# Altium PCB main.PcbDoc
Units mm, origin at the board's own origin, x right, y up, seen from the top; angles counter-clockwise.
Board outline 156 x 26 mm, 2 copper layers (Top Layer, Bottom Layer); 35 components, 16 nets, 174 pads, 20 vias.
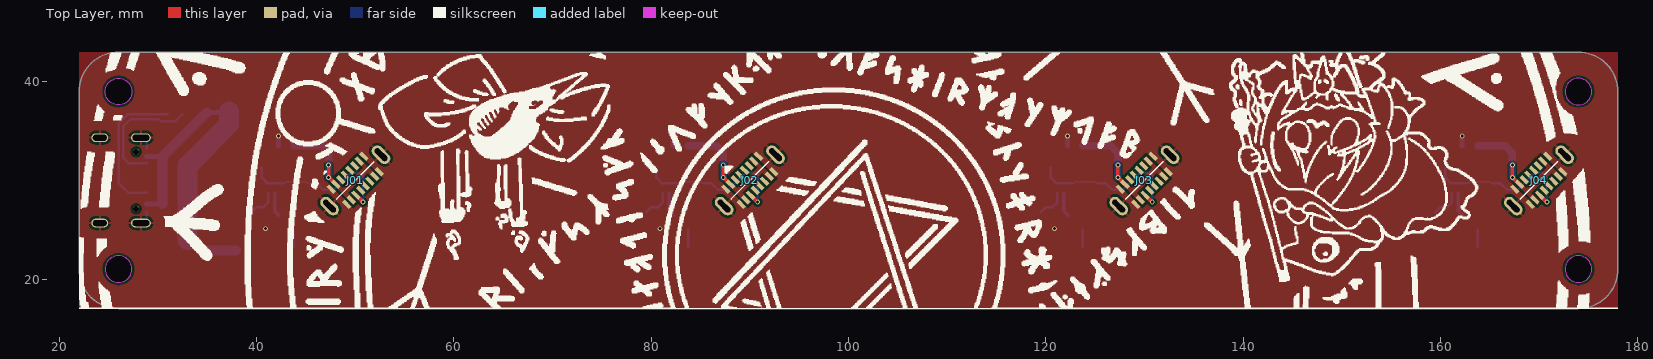
[diagram p0: Top Layer view]
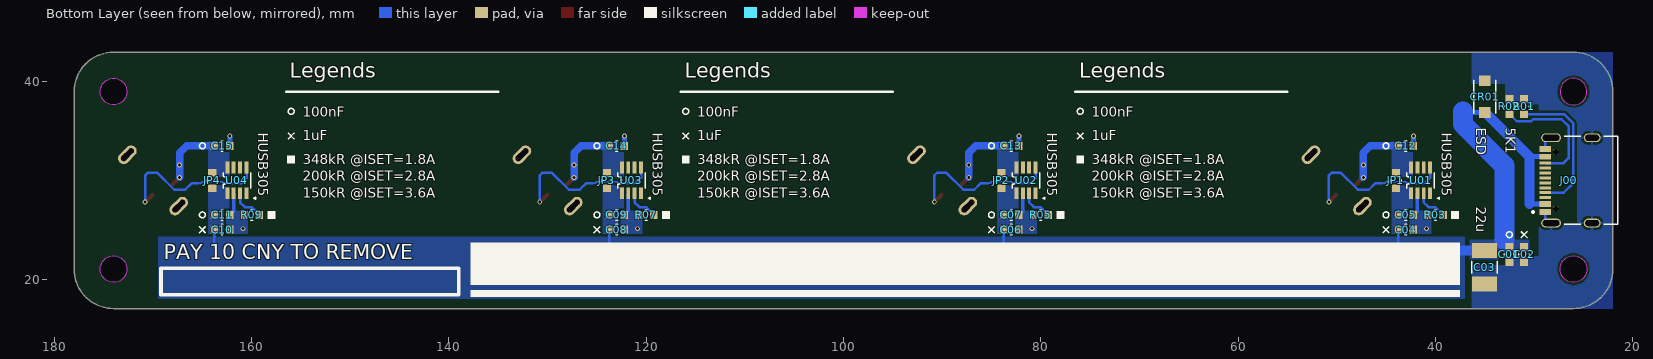
[diagram p1: Bottom Layer view, seen from below]
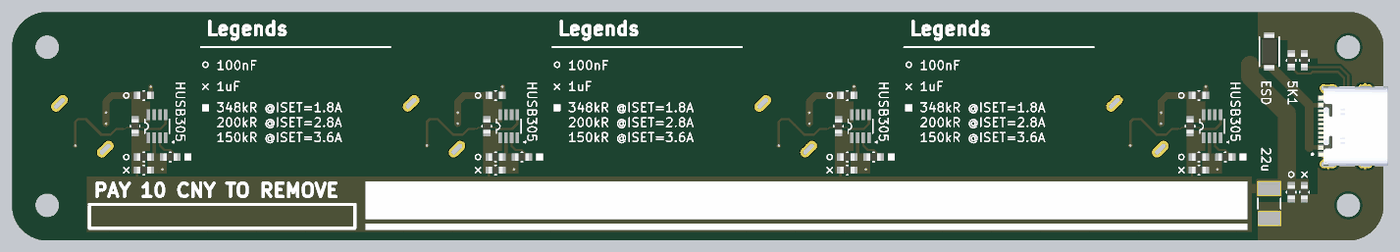
[diagram p2: 3D render of the assembled board from below, using the file's embedded part models]

## Layer stack, top to bottom
Top Solder: solder mask 0.0102, Solder Resist, Dk 3.5
Top Layer: signal copper 0.0356
Dielectric 1: dielectric 0.32, FR-4, Dk 4.8
Bottom Layer: signal copper 0.0356
Bottom Solder: solder mask 0.0102, Solder Resist, Dk 3.5

## Board outline
22,21 22,39 cw(c26,39) 26,43 174,43 cw(c174,39) 178,39 178,21 cw(c174,21) 174,17 26,17 cw(c26,21)
cut-out: 172.65,21 ccw(c174,21) 174,19.65 ccw(c174,21) 175.35,21 ccw(c174,21) 174,22.35 ccw(c174,21)
cut-out: 172.65,39 ccw(c174,39) 174,37.65 ccw(c174,39) 175.35,39 ccw(c174,39) 174,40.35 ccw(c174,39)
cut-out: 24.65,21 ccw(c26,21) 26,19.65 ccw(c26,21) 27.35,21 ccw(c26,21) 26,22.35 ccw(c26,21)
cut-out: 26,37.65 cw(c26,39) 24.65,39 cw(c26,39) 26,40.35 cw(c26,39) 27.35,39 cw(c26,39)

## Design rules (kind name [scope] priority, off if disabled: settings)
Clearance [All] p1: gap=0.254 ignorepadtopadclearanceinfootprint=FALSE except(0.102: Arc-Arc Arc-Track Arc-SMDPad Track-Track Track-SMDPad; 0.152: SMDPad-SMDPad; 0.2: Arc-Hole Track-Hole; 0.203: Arc-Via Track-Via Via-Fill Via-Poly Via-Region; 0.35: Arc-THPad Track-THPad)
PolygonConnect [All] p1: thpad.connectstyle=Relief thpad.reliefconductorwidth=0.254 thpad.reliefentries=4 thpad.polygonreliefangle="90 Angle" thpad.airgapwidth=0.254 smdpad.connectstyle=Direct smdpad.reliefconductorwidth=0.254 smdpad.reliefentries=4 smdpad.polygonreliefangle="90 Angle" smdpad.airgapwidth=0.254 via.connectstyle=Direct via.reliefconductorwidth=0.254 via.reliefentries=4 via.polygonreliefangle="90 Angle" via.airgapwidth=0.254
RoutingVias [All] p1: holewidth=0.3 width=0.5 viastyle="Through Hole" minholewidth=0.3 minwidth=0.5 maxholewidth=0.3 maxwidth=0.5
SolderMaskExpansion [All] p1: expansion=0.102 istentingtop=FALSE
SupplyNets "Schematic Supply Nets_5" [InNet('VPORT3')] p1: voltage=0.000
SupplyNets "Schematic Supply Nets_4" [InNet('VPORT2')] p2: voltage=0.000
SupplyNets "Schematic Supply Nets_3" [InNet('GND')] p3: voltage=0.000
SupplyNets "Schematic Supply Nets_2" [InNet('VPORT4')] p4: voltage=0.000
SupplyNets "Schematic Supply Nets_1" [InNet('VPORT1')] p5: voltage=0.000
SupplyNets "Schematic Supply Nets" [InNet('VBUS')] p6: voltage=0.000
Width [All] p1: maxlimit=5.08 minlimit=0.102 preferedwidth=0.254 minimp=50.000000 maximp=50.000000 favimp=50.000000
30 further rules are at their usual default settings.

## Components (designator, comment, footprint, x,y, rotation, side; value= is the part's Value field where it differs from the comment)
C01 "100n" RC0603N_YAG 32.5,22.5 r270 bottom
C02 "1u" RC0603N_YAG 31,22.5 r270 bottom
C03 "22u" RC1210 35,21.2 r270 bottom
C04 "1u" RC0603N_YAG 43,25 r180 bottom
C05 "100n" RC0603N_YAG 43,26.5 r180 bottom
C06 "1u" RC0603N_YAG 83,25 r180 bottom
C07 "100n" RC0603N_YAG 83,26.5 r180 bottom
C08 "1u" RC0603N_YAG 123,25 r180 bottom
C09 "100n" RC0603N_YAG 123,26.5 r180 bottom
C10 "1u" RC0603N_YAG 163,25 r180 bottom
C11 "100n" RC0603N_YAG 163,26.5 r180 bottom
C12 "100n" RC0603N_YAG 43,33.5 r180 bottom
C13 "100n" RC0603N_YAG 83,33.5 r180 bottom
C14 "100n" RC0603N_YAG 123,33.5 r180 bottom
C15 "100n" RC0603N_YAG 163,33.5 r180 bottom
CR01 "SMF6.5CA" SOD-123F_LTF 35,38.5 r90 bottom
J00 "TYPE-C-31-M-12" HRO_TYPE-C-31-M-12 24.1,30 r90 bottom
J01 "TYPE-C MALE" "TYPE-C MALE" 50,30 r45 top
J02 "TYPE-C MALE" "TYPE-C MALE" 90,30 r45 top
J03 "TYPE-C MALE" "TYPE-C MALE" 130,30 r45 top
J04 "TYPE-C MALE" "TYPE-C MALE" 170,30 r45 top
JP1 "0R" RC0603N_YAG 44,30 r90 bottom
JP2 "0R" RC0603N_YAG 84,30 r90 bottom
JP3 "0R" RC0603N_YAG 124,30 r90 bottom
JP4 "0R" RC0603N_YAG 164,30 r90 bottom
R01 "5K1" RC0603N_YAG 31,37.5 r90 bottom
R02 "5K1" RC0603N_YAG 32.5,37.5 r90 bottom
R03 "150K" RC0603N_YAG 40,26.5 r180 bottom
R05 "150K" RC0603N_YAG 80,26.5 r180 bottom
R07 "150K" RC0603N_YAG 120,26.5 r180 bottom
R09 "150K" RC0603N_YAG 160,26.5 r180 bottom
U01 "HUSB305-01" TSOT23-8L 41.5,30 r90 bottom
U02 "HUSB305-01" TSOT23-8L 81.5,30 r90 bottom
U03 "HUSB305-01" TSOT23-8L 121.5,30 r90 bottom
U04 "HUSB305-01" TSOT23-8L 161.5,30 r90 bottom

## Footprints (in the part's own frame and the unit in brackets; to place one, negate y for a bottom-side part, rotate by r counter-clockwise, add the part's x,y. Pads: shape width x height; smd on the part's side, far side on the other; paste and mask are expansions set on the pad)
HRO_TYPE-C-31-M-12 [mm]
  rect 0.6x1.14 smd mask+0.05: A1_B12(-3.2,4.75) A4_B9(-2.4,4.75) B1_A12(3.2,4.75) B4_A9(2.4,4.75)
  rect 0.3x1.14 smd mask+0.05: A5(-1.25,4.75) A6(-0.25,4.75) A7(0.25,4.75) A8(1.25,4.75) B5(1.75,4.75) B6(0.75,4.75) B7(-0.75,4.75) B8(-1.75,4.75)
  oval 0.9x2 hole 0.6 slot 1.7 at 90 deg: S1(-4.325,4.17) S2(4.325,4.17)
  oval 0.9x1.7 hole 0.6 slot 1.4 at 90 deg: S3(-4.325,0) S4(4.325,0)
  round 0.6 hole 0.6 unplated: ""(-2.89,3.68) ""(2.89,3.68)
  silkscreen extent -4.47,-2.6 4.47,6.1, body extent -4.47,-2.6 4.47,5.31, height 3.31
RC0603N_YAG [mil]
  rect 30x32 smd paste+0 mask+0: 1(-30.5,0) 2(30.5,0)
  silkscreen extent -3,-21 3,21, body extent -31,-16 31,16, height 28
RC1210 [mm]
  rect 1.52x2.54 smd: 1(-1.71,0) 2(1.71,0)
  silkscreen extent -0.6,-1.3 0.6,1.3
SOD-123F_LTF [mil]
  rect 43x47 smd paste+0 mask+0: 1(-63.5,0) 2(63.5,0)
  silkscreen extent -66,-45 66,45, body extent -77,-39 77,39, height 43
TSOT23-8L [mm]
  rect 1.2x0.4 smd mask+0: 1(-1.3,0.975) 2(-1.3,0.325) 3(-1.3,-0.325) 4(-1.3,-0.975) 5(1.3,-0.975) 6(1.3,-0.325) 7(1.3,0.325) 8(1.3,0.975)
  silkscreen extent -0.8,-1.4 0.8,1.4
"TYPE-C MALE" [mm]
  rect 0.4x1 smd: A1(2.345,1.1) A4(1.675,1.1) A5(1.005,1.1) A6(0.335,1.1) A7(-0.335,1.1) A8(-1.005,1.1) A9(-1.675,1.1) A12(-2.345,1.1) B1(-2.345,-1.1) B4(-1.675,-1.1) B5(-1.005,-1.1) B6(-0.335,-1.1) B7(0.335,-1.1) B8(1.005,-1.1) B9(1.675,-1.1) B12(2.345,-1.1)
  oval 1.15x2.2 hole 0.55 slot 1.6 at 90 deg: P1(-3.685,0) P1(3.685,0)
  silkscreen extent -2.68,0 2.68,0

## Part data
C01 C02 C03 C04 C05 C06 C07 C08 C09 C10 C11 C12 C13 C14 C15: library part Capacitor, Manufacturer_Name=Yageo, Manufacturer_Part_Number=RC0603FR-0747KL, Copyright="Copyright (C) 2025 Ultra Librarian. All rights reserved."
CR01: "Description", Manufacturer_Name="Littelfuse Inc", Copyright="Copyright (C) 2026 Ultra Librarian. All rights reserved.", Manufacturer_Part_Number=SMF6.5CA
J00: "USB Connectors 24 Receptacle 1 8.94*7.3mm RoHS", Package=Package, Check_prices=https://www.snapeda.com/parts/TYPE-C-31-M-12/HRO+Electronics+Co.%252C+Ltd./view-part/?ref=eda, MF="HRO Electronics Co., Ltd.", MP=TYPE-C-31-M-12, SnapEDA_Link=https://www.snapeda.com/parts/TYPE-C-31-M-12/HRO+Electronics+Co.%252C+Ltd./view-part/?ref=snap
JP1 JP2 JP3 JP4 R01 R02 R03 R05 R07 R09: library part RC0603, "RES SMD 47K OHM 1% 1/10W 0603", Manufacturer_Name=Yageo, Manufacturer_Part_Number=RC0603FR-0747KL, Copyright="Copyright (C) 2025 Ultra Librarian. All rights reserved."

## Via types
v1: diameter 0.5, hole 0.3, Top Layer to Bottom Layer, tented both sides, 20 vias

## Nets (pads, with @x,y where several pads share a name; then routed paths per layer and width w, separated by ;. In a path a pad name is that pad's centre, name@x,y a point inside that pad or via, vN(x,y) a via of type N, cw(c..) or ccw(c..) an arc to the next point about the centre after c; other vN are vias at no path point)
CC2_P1: J01.B5 U01.5 | length 16.5
  Top Layer w0.381: J01.B5 v1@50.779,27.8
  Bottom Layer w0.127: 42.6,29.7 42.85,29.7 43,29.85 45,29.85 45.15,29.7 45.4,29.7
  Bottom Layer w0.254: U01.5 40.525,30.275 41.1,29.7 42.6,29.7 ; 45.4,29.7 46.1,29.7 46.75,29.05 47.85,29.05 49.6,30.8 50.5,30.8 50.8,30.5 v1(50.8,27.8)
CC2_P2: J02.B5 U02.5 | length 16.5
  Top Layer w0.381: J02.B5 v1@90.779,27.8
  Bottom Layer w0.127: 82.6,29.7 82.85,29.7 83,29.85 85,29.85 85.15,29.7 85.4,29.7
  Bottom Layer w0.254: U02.5 80.525,30.275 81.1,29.7 82.6,29.7 ; 85.4,29.7 86.1,29.7 86.75,29.05 87.85,29.05 89.6,30.8 90.5,30.8 90.8,30.5 v1(90.8,27.8)
CC2_P3: J03.B5 U03.5 | length 16.5
  Top Layer w0.381: J03.B5 v1@130.779,27.8
  Bottom Layer w0.127: 122.6,29.7 122.85,29.7 123,29.85 125,29.85 125.15,29.7 125.4,29.7
  Bottom Layer w0.254: U03.5 120.525,30.275 121.1,29.7 122.6,29.7 ; 125.4,29.7 126.1,29.7 126.75,29.05 127.85,29.05 129.6,30.8 130.5,30.8 130.8,30.5 v1(130.8,27.8)
CC2_P4: J04.B5 U04.5 | length 16.5
  Top Layer w0.381: J04.B5 v1@170.779,27.8
  Bottom Layer w0.127: 162.6,29.7 162.85,29.7 163,29.85 165,29.85 165.15,29.7 165.4,29.7
  Bottom Layer w0.254: U04.5 160.525,30.275 161.1,29.7 162.6,29.7 ; 165.4,29.7 166.1,29.7 166.75,29.05 167.85,29.05 169.6,30.8 170.5,30.8 170.8,30.5 v1(170.8,27.8)
GND: C01.2 C02.2 C03.2 C04.2 C05.2 C06.2 C07.2 C08.2 C09.2 C10.2 C11.2 C12.2 C13.2 C14.2 C15.2 CR01.2 J00.A1_B12 J00.B1_A12 J00.S1 J00.S2 J00.S3 J00.S4 J01.A1 J01.A12 J01.B1 J01.B12 J01.P1 J02.A1 J02.A12 J02.B1 J02.B12 J02.P1 J03.A1 J03.A12 J03.B1 J03.B12 J03.P1 J04.A1 J04.A12 J04.B1 J04.B12 J04.P1 R01.2 R02.2 R03.1 R05.1 R07.1 R09.1 U01.2 U02.2 U03.2 U04.2 | length 16.5
  Bottom Layer w0.254: J00.S1 28.552,25.675 28.85,25.973 J00.A1_B12 ; J00.S2 28.552,34.325 28.85,34.027 J00.B1_A12
  Bottom Layer w0.381: U01.2 41.825,26.926 42.225,26.525 C05.2 ; U02.2 81.825,26.926 82.225,26.525 C07.2 ; U03.2 121.825,26.926 122.225,26.525 C09.2 ; U04.2 161.825,26.926 162.225,26.525 C11.2
  Bottom Layer w0.508: C12.2 v1(42.225,34.5) ; C13.2 v1(82.225,34.5) ; C14.2 v1(122.225,34.5) ; C15.2 v1(162.225,34.5)
  other v1: 40.9,25.1 80.9,25.1 120.9,25.1 160.9,25.1
NetJ00_A5: J00.A5 R01.1 | length 14.7
  Bottom Layer w0.254: J00.A5 27,28.75 26,29.75 26,35.75 26.975,36.725 R01.1
NetJ00_B5: J00.B5 R02.1 | length 12.5
  Bottom Layer w0.254: J00.B5 27,31.75 26.5,32.25 26.5,35.5 27.2,36.2 30.1,36.2 30.3,36 31.749,36 32.475,36.725 R02.1
NetR03_2: R03.2 U01.3 | length 3
  Bottom Layer w0.254: R03.2@39.505,26.779 40.025,27.3 40.7,27.3 41.175,27.775 U01.3
NetR05_2: R05.2 U02.3 | length 3
  Bottom Layer w0.254: R05.2@79.505,26.779 80.025,27.3 80.7,27.3 81.175,27.775 U02.3
NetR07_2: R07.2 U03.3 | length 3
  Bottom Layer w0.254: R07.2@119.505,26.779 120.025,27.3 120.7,27.3 121.175,27.775 U03.3
NetR09_2: R09.2 U04.3 | length 3
  Bottom Layer w0.254: R09.2@159.505,26.779 160.025,27.3 160.7,27.3 161.175,27.775 U04.3
VBUS: C01.1 C02.1 C03.1 C04.1 C05.1 C06.1 C07.1 C08.1 C09.1 C10.1 C11.1 CR01.1 J00.A4_B9 J00.B4_A9 JP1.1 JP2.1 JP3.1 JP4.1 U01.1 U02.1 U03.1 U04.1 | length 41.2
  Bottom Layer w0.254: 37.103,36.887 37.2,36.984 ; 43.775,23.275 C04.1 ; 83.775,23.275 C06.1 ; 123.775,23.275 C08.1 ; 163.775,23.275 C10.1
  Bottom Layer w0.508: J00.A4_B9 30.462,27.6 ; J00.B4_A9 30.462,32.4 ; CR01.1@34.949,36.887 CR01.1 37.103,36.887
  Bottom Layer w1.016: 30.462,27.6 30.462,32.4 CR01.1@34.949,36.887 ; C03.1 37.9,22.91
  Bottom Layer w2.032: 33,23.951 33,31.5 37.2,35.7 37.2,36.984
VPORT1: C12.1 J01.A4 J01.A9 J01.B4 J01.B9 JP1.2 U01.8 | length 8.6
  Top Layer w0.254: v1@47.3,31.545 v1(47.305,31.55)
  Top Layer w0.381: v1@47.3,30.305 v1@47.3,31.545 ; v1@47.326,30.305 J01.A9
  Bottom Layer w0.762: C12.1 46.6,33.5 47.305,32.795 v1(47.305,31.55) v1(47.305,30.305)
VPORT2: C13.1 J02.A4 J02.A9 J02.B4 J02.B9 JP2.2 U02.8 | length 8.6
  Top Layer w0.381: v1@87.3,30.305 v1@87.3,31.545 ; v1@87.326,30.305 J02.A9
  Bottom Layer w0.762: C13.1 86.6,33.5 87.305,32.795 v1(87.305,30.305)
  other v1: 87.305,31.55
VPORT3: C14.1 J03.A4 J03.A9 J03.B4 J03.B9 JP3.2 U03.8 | length 8.6
  Top Layer w0.381: v1@127.3,30.305 v1@127.3,31.545 ; v1@127.326,30.305 J03.A9
  Bottom Layer w0.762: C14.1 126.6,33.5 127.305,32.795 v1(127.305,30.305)
  other v1: 127.305,31.55
VPORT4: C15.1 J04.A4 J04.A9 J04.B4 J04.B9 JP4.2 U04.8 | length 8.6
  Top Layer w0.381: v1@167.3,30.305 v1@167.3,31.545 ; v1@167.326,30.305 J04.A9
  Bottom Layer w0.762: C15.1 166.6,33.5 167.305,32.795 v1(167.305,30.305)
  other v1: 167.305,31.55
pads on no net: J00. J00.A6 J00.A7 J00.A8 J00.B6 J00.B7 J00.B8 J01.A5 J01.A6 J01.A7 J01.A8 J01.B6 J01.B7 J01.B8 J02.A5 J02.A6 J02.A7 J02.A8 J02.B6 J02.B7 J02.B8 J03.A5 J03.A6 J03.A7 J03.A8 J03.B6 J03.B7 J03.B8 J04.A5 J04.A6 J04.A7 J04.A8 J04.B6 J04.B7 J04.B8 U01.4 U01.6 U01.7 U02.4 U02.6 U02.7 U03.4 U03.6 U03.7 U04.4 U04.6 U04.7

## Polygon pours and split planes (outlines as drawn)
VPORT1 on Bottom Layer "NONET_L-01_P-001" (solid, pour order 9): 42.275,33.906 42.275,30.394 44.406,30.394 44.406,33.906
VPORT4 on Bottom Layer "NONET_L-01_P-001" (solid, pour order 16): 162.275,33.906 162.275,30.394 164.406,30.394 164.406,33.906
VPORT3 on Bottom Layer "NONET_L-01_P-001" (solid, pour order 13): 122.275,33.906 122.275,30.394 124.406,30.394 124.406,33.906
VPORT2 on Bottom Layer "NONET_L-01_P-001" (solid, pour order 11): 82.275,33.906 82.275,30.394 84.406,30.394 84.406,33.906
GND on Bottom Layer "NONET_L-01_P-001" (solid, pour order 24): 22,35.2 25.612,35.2 25.612,24.8 22,24.8
GND on Bottom Layer "NONET_L-01_P-001" (solid, pour order 23): 29.5,34.4 22,34.4 22,43 36.3,43 36.3,39.8 32.9,39.8 32.9,37.7 29.5,37.7
GND on Bottom Layer "NONET_L-01_P-001" (solid, pour order 22): 29.5,25.6 22,25.6 22,17 36.3,17 36.3,21.4 32.9,21.4 32.9,22.3 29.5,22.3
VBUS on Bottom Layer "NONET_L-01_P-001" (solid, pour order 18): 162.275,29.606 164.406,29.606 164.406,24.594 162.275,24.594
VBUS on Bottom Layer "NONET_L-01_P-001" (solid, pour order 15): 122.275,29.606 124.406,29.606 124.406,24.594 122.275,24.594
VBUS on Bottom Layer "NONET_L-01_P-001" (solid, pour order 14): 82.275,29.606 84.406,29.606 84.406,24.594 82.275,24.594
VBUS on Bottom Layer "NONET_L-01_P-001" (solid, pour order 8): 42.275,29.606 44.406,29.606 44.406,24.594 42.275,24.594
VBUS on Bottom Layer "NONET_L-01_P-001" (solid, pour order 21): 30.5,22.7 30.5,24 36.5,24 36.5,22 33.5,22 33.5,22.7
VBUS on Bottom Layer "NONET_L-01_P-001" (solid, pour order 20): 37,24.3 37,18 169.5,18 169.5,24.3
GND on Bottom Layer "NONET_L-01_P-001" (solid, pour order 17): 160.4,26.9 162.6,26.9 162.6,24.6 160.4,24.6
GND on Bottom Layer "NONET_L-01_P-001" (solid, pour order 12): 120.4,26.9 122.6,26.9 122.6,24.6 120.4,24.6
GND on Bottom Layer "NONET_L-01_P-001" (solid, pour order 10): 80.4,26.9 82.6,26.9 82.6,24.6 80.4,24.6
GND on Bottom Layer "NONET_L-01_P-001" (solid, pour order 0): 40.4,26.9 42.6,26.9 42.6,24.6 40.4,24.6
GND on Top Layer "NONET_L-01_P-001" (solid, pour order 26): 22,43 22,17 178,17 178,43
VPORT1 on Top Layer "NONET_L-01_P-001" (solid, pour order 4): 50.194,32.457 47.543,29.806 49.806,27.543 52.457,30.194
VPORT4 on Top Layer "NONET_L-01_P-001" (solid, pour order 7): 170.194,32.457 167.543,29.806 169.806,27.543 172.457,30.194
VPORT3 on Top Layer "NONET_L-01_P-001" (solid, pour order 6): 130.194,32.457 127.543,29.806 129.806,27.543 132.457,30.194
VPORT2 on Top Layer "NONET_L-01_P-001" (solid, pour order 5): 90.194,32.457 87.543,29.806 89.806,27.543 92.457,30.194

## Other copper
Bottom Layer:
  pour cut-out: 29.7,36.4 29.7,34.4 26.3,34.4 26.3,35.6 27.1,36.4

## Silkscreen, mask and mechanical layers (free items; w line width, h text height)
Top Overlay:
  drawing of 137 lines, arcs and shapes, not listed
Bottom Overlay:
  circle w0.152: c76,37 r0.3
  circle w0.152: c116,37 r0.3
  circle w0.152: c156,37 r0.3
  circle w0.152: c165,33.5 r0.3
  circle w0.152: c165,26.5 r0.3
  circle w0.152: c125,33.5 r0.3
  circle w0.152: c125,26.5 r0.3
  circle w0.152: c85,33.5 r0.3
  circle w0.152: c85,26.5 r0.3
  circle w0.152: c32.5,24.5 r0.3
  circle w0.152: c45,26.5 r0.3
  circle w0.152: c45,33.5 r0.3
  rectangle: 37.5,19.4 137.8,23.7
  rectangle: 37.5,18.2 137.8,18.9
  rectangle: 75.6,31.7 76.4,32.5
  rectangle: 115.6,31.7 116.4,32.5
  rectangle: 155.6,31.7 156.4,32.5
  rectangle: 37.6,26.1 38.4,26.9
  rectangle: 157.6,26.1 158.4,26.9
  rectangle: 117.6,26.1 118.4,26.9
  rectangle: 77.6,26.1 78.4,26.9
  lines w0.152: 30.7,24.2 31.3,24.8 ; 30.7,24.8 31.3,24.2 ; 44.7,24.7 45.3,25.3 ; 44.7,25.3 45.3,24.7 ; 75.7,34.2 76.3,34.8 ; 75.7,34.8 76.3,34.2 ; 84.7,24.7 85.3,25.3 ; 84.7,25.3 85.3,24.7 ; 115.7,34.2 116.3,34.8 ; 115.7,34.8 116.3,34.2 ; 124.7,24.7 125.3,25.3 ; 124.7,25.3 125.3,24.7 ; 155.7,34.2 156.3,34.8 ; 155.7,34.8 156.3,34.2 ; 164.7,24.7 165.3,25.3 ; 164.7,25.3 165.3,24.7 ; 39.6,28.1 39.8,28.2 39.6,28.3 39.6,28.1 ; 79.6,28.1 79.6,28.3 79.8,28.2 79.6,28.1 ; 119.6,28.1 119.6,28.3 119.8,28.2 119.6,28.1 ; 159.6,28.1 159.6,28.3 159.8,28.2 159.6,28.1
  lines w0.254: 55,39 76.5,39 ; 95,39 116.5,39 ; 135,39 156.5,39
  lines w0.381: 139,18.4 169.2,18.4 169.2,21.1 139,21.1 139,18.4
  text "Legends" at 76.119,40.389 h1.52
  text "Legends" at 116.119,40.389 h1.52
  text "Legends" at 156.119,40.389 h1.52
  text "100nF" at 74.848,36.452 h1
  text "100nF" at 114.848,36.452 h1
  text "100nF" at 154.848,36.452 h1
  text "5K1" at 32.848,35.348 h1 r90
  text "ESD" at 35.848,35.348 h1 r90
  text "HUSB305" at 39.348,34.817 h1 r90
  text "HUSB305" at 79.348,34.817 h1 r90
  text "HUSB305" at 119.348,34.817 h1 r90
  text "HUSB305" at 159.348,34.817 h1 r90
  text "1uF" at 74.848,34.052 h1
  text "1uF" at 114.848,34.052 h1
  text "1uF" at 154.848,34.052 h1
  text "348kR @ISET=1.8A" at 74.848,31.652 h1
  text "348kR @ISET=1.8A" at 114.848,31.652 h1
  text "348kR @ISET=1.8A" at 154.848,31.652 h1
  text "200kR @ISET=2.8A" at 74.848,29.952 h1
  text "200kR @ISET=2.8A" at 114.848,29.952 h1
  text "200kR @ISET=2.8A" at 154.848,29.952 h1
  text "150kR @ISET=3.6A" at 74.848,28.252 h1
  text "150kR @ISET=3.6A" at 114.848,28.252 h1
  text "150kR @ISET=3.6A" at 154.848,28.252 h1
  text "22u" at 35.848,27.318 h1 r90
  text "PAY 10 CNY TO REMOVE" at 168.919,21.981 h1.52
Mechanical 1:
  circle w0.152: c174,21 r4
  circle w0.152: c174,39 r4
  circle w0.152: c26,39 r4
  circle w0.152: c26,21 r4
  circle w0.152: c174,21 r1.35
  circle w0.152: c174,39 r1.35
  circle w0.152: c26,21 r1.35
  circle w0.152: c26,39 r1.35
  lines w0.152: 22,30 32,30 ; 48.232,28.232 51.768,31.768 ; 48.939,31.061 51.061,28.939 ; 88.232,28.232 91.768,31.768 ; 88.939,31.061 91.061,28.939 ; 128.232,28.232 131.768,31.768 ; 128.939,31.061 131.061,28.939 ; 168.232,28.232 171.768,31.768 ; 168.939,31.061 171.061,28.939 ; 22,21 ccw(c26,21) 26,17 174,17 ccw(c174,21) 178,21 178,39 ccw(c174,39) 174,43 26,43 ccw(c26,39) 22,39 22,21
Drill Drawing:
  text ".Legend" at 181.254,17.762 h1.52

## Text inside footprints (layer, text, board x,y; h text height)
J00: Mechanical 13 "PCB EDGE" at 22.2,35.2 h0.61 r270